# EAGLE board Rangkaian Supply (EAGLE 7.3.0)
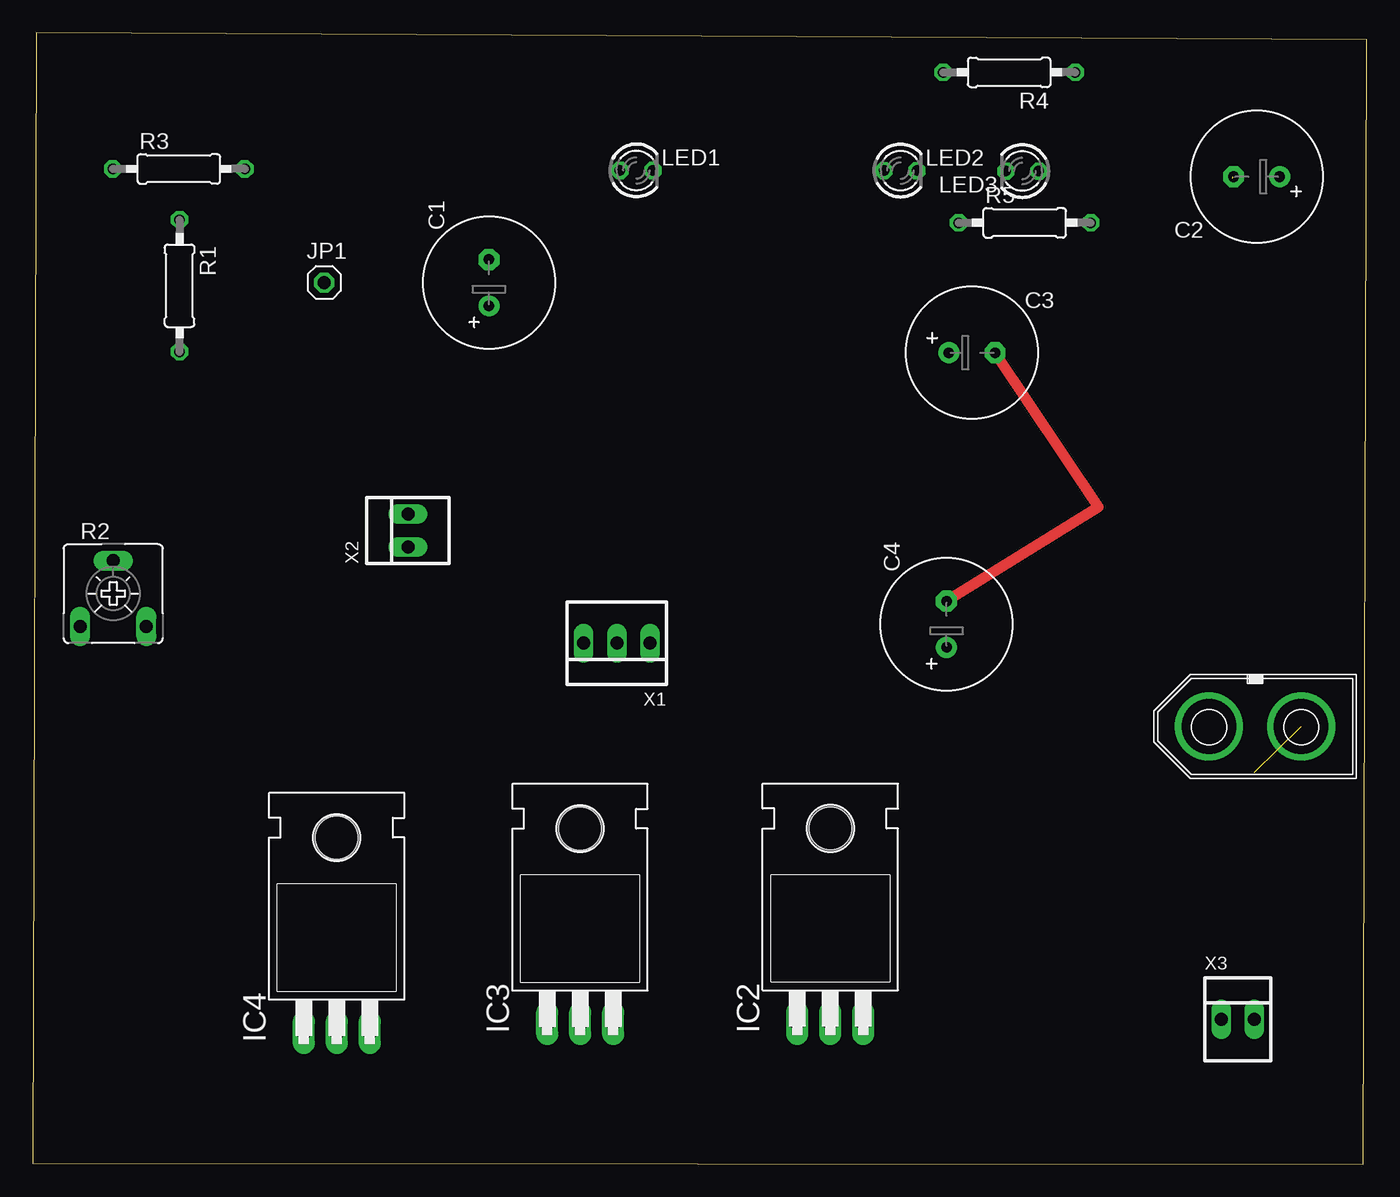
[diagram p0: board, top side]
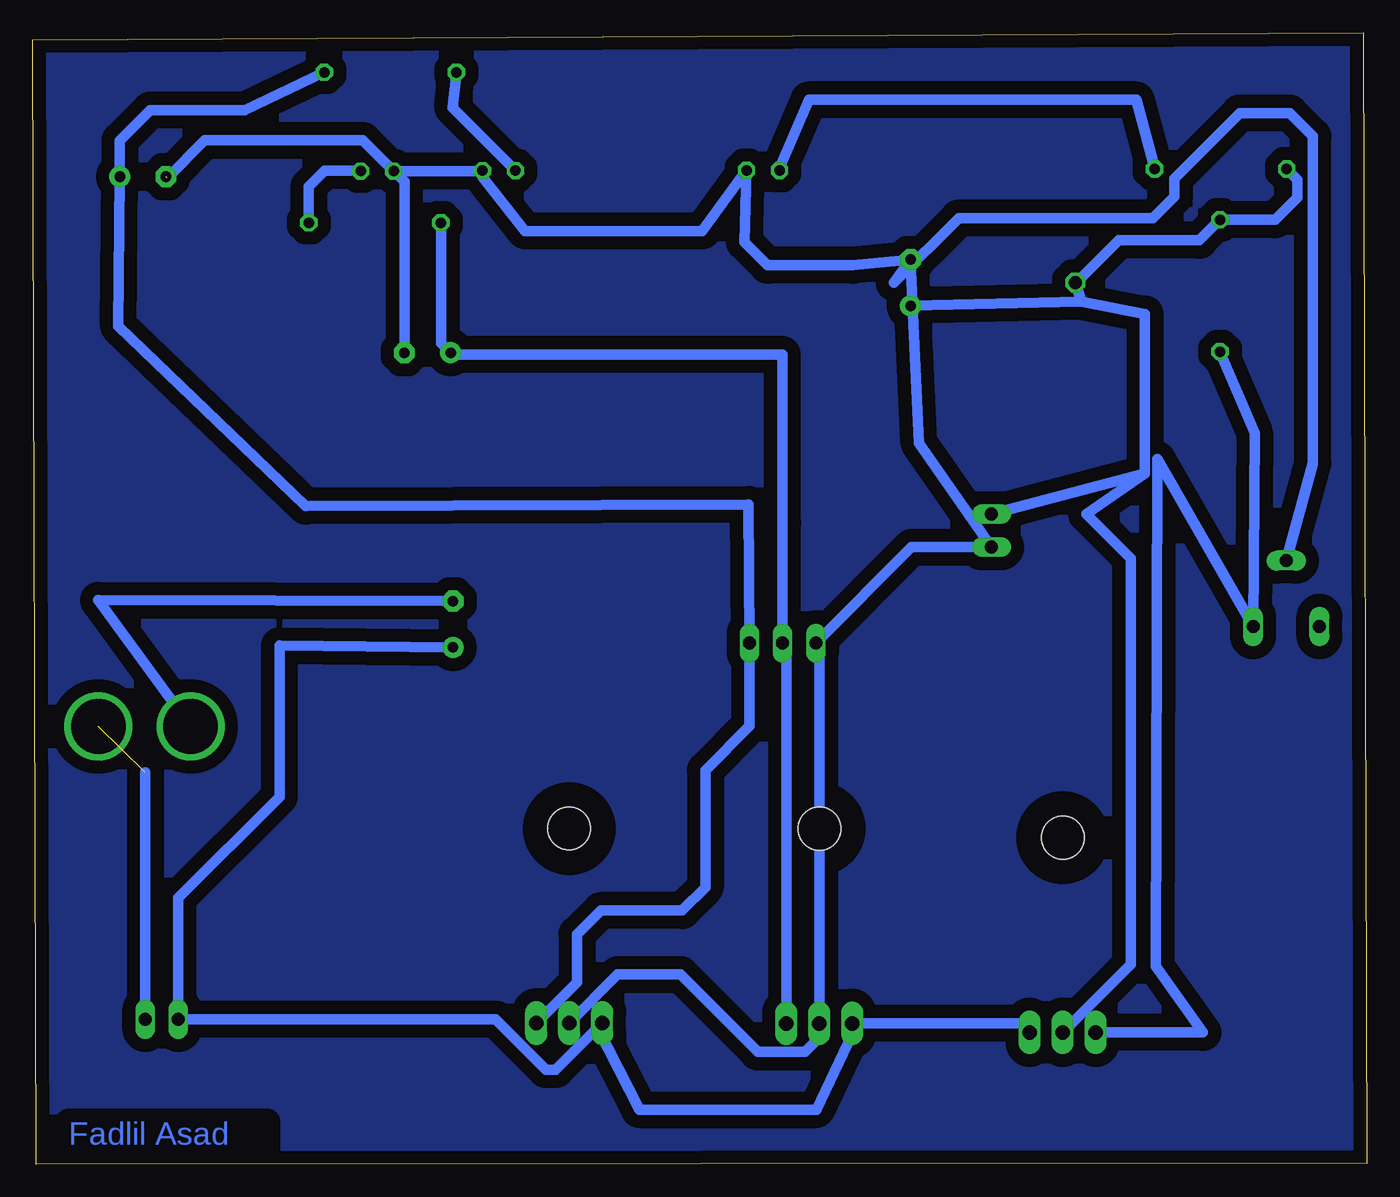
[diagram p1: board, bottom side, seen from below]

Size 102.67 x 87.09 mm. Coordinates in mm from the lower left corner, seen from the top.
Outline: 0,0.07 102.39,0 102.67,86.55 0.28,87.09 0,0.07
Copper layers (1*16): Top 0.035mm / dielectric 1.5mm / Bottom 0.035mm
Design rules "default": minimum track width 6mil, minimum drill 0.35mm, track to track 6mil, track to pad 6mil, pad to pad 6mil, via to via 6mil, smd to smd 6mil, copper to edge 40mil, drill to drill 6mil, minimum pad ring 10mil, minimum via ring 8mil, stop-mask expansion 4mil, vias tented up to drill 0mil, thermal gap 10mil

## Footprints (pad centres in the part's own frame; a part is rotated, then mirrored left to right if it is on the bottom)
E3,5-10 = drill 0.813 pad 1.6: + -1.778,0 | drill 0.813 pad 1.6 octagon: - 1.778,0
TO220H = drill 1.118 long: 1 -2.54,-10.16; 2 0,-10.16; 3 2.54,-10.16 | hole 3.302: 0,4.826
1X01 = drill 1.016 octagon: 1 0,0
LED3MM = drill 0.813 octagon: A -1.27,0; K 1.27,0
0207/10 = drill 0.813 octagon: 1 -5.08,0; 2 5.08,0
CA6V = drill 1.016 long: A -2.54,-2.54; E 2.54,-2.54; S 0,2.54
CON-XT60M = drill 4.2: V+ -3.55,0; V- 3.55,0
22-23-2031 = drill 1 long: 1 -2.54,0; 2 0,0; 3 2.54,0
22-23-2021 = drill 1 long: 1 -1.27,0; 2 1.27,0

## Placement (x,y rotation side)
C1  1000uF/16V  [E3,5-10]  35.12,67.83 90 top
C2  1000uF/16V  [E3,5-10]  94.18,75.99 180 top
C3  1000uF/16V  [E3,5-10]  72.28,62.45 0 top
C4  1000uF/16V  [E3,5-10]  70.32,41.56 90 top
IC2  7805T  [TO220H]  61.39,21.02 0 top
IC3  7805T  [TO220H]  42.13,21.01 0 top
IC4  317T  [TO220H]  23.41,20.32 0 top
JP1  [1X01]  22.45,67.85 0 top
LED1  [LED3MM]  46.46,76.48 0 top
LED2  [LED3MM]  66.78,76.47 0 top
LED3  [LED3MM]  76.15,76.43 180 top
R1  1K2  [0207/10]  11.31,67.6 270 top
R2  20K  [CA6V]  6.21,43.92 0 top
R3  1K  [0207/10]  11.26,76.59 0 top
R4  1K  [0207/10]  75.14,84.02 180 top
R5  1K  [0207/10]  76.33,72.44 0 top
VIN  [CON-XT60M]  94.06,33.69 180 top
X1  VSYS  [22-23-2031]  44.95,40.11 180 top
X2  VMOT  [22-23-2021]  28.89,48.75 90 top
X3  switch  [22-23-2021]  92.72,11.16 0 top

## Library data of the parts
C1-C4 R1 R3-R5 = rcl
IC2-IC4 = linear
JP1 = pinhead
LED1-LED3 = led
R2 = pot
VIN = con-XT60M
X1 = con-molex; MF: MOLEX; MPN: 22-23-2031; OC_FARNELL: 1462950; OC_NEWARK: 30C0862
X2 X3 = con-molex; MF: MOLEX; MPN: 22-23-2021; OC_FARNELL: 1462926; OC_NEWARK: 25C3832

## Nets
+12V: C3.+ IC3.3 R5.1 X1.2
GND: C1.- C2.- C3.- C4.- IC2.2 IC3.2 LED1.K LED2.K LED3.K R2.S VIN.V- X1.3 X2.1
N$1: IC4.1 R1.2 R2.E
N$2: LED1.A R3.2
N$3: LED3.A R5.2
N$4: VIN.V+ X3.2
N$5: LED2.A R4.2
VCC: C2.+ IC2.3 R4.1 X1.1
VDD: C1.+ IC4.2 JP1.1 R1.1 R3.1 X2.2
VPP: C4.+ IC2.1 IC3.1 IC4.3 X3.1

## Tracks (layer width: path | path; a pad name or v marks a point on that pad's centre or on a via)
+12V
  Bottom 0.813: R5.1 71.25,63.2 C3.+ 70.37,62.32 44.98,62.32 44.95,49.35 X1.2 44.67,39.82 IC3.3
GND  (1 unrouted)
  Top 0.813: C4.- 82.02,50.58 C3.-
  Bottom 0.813: 42.38,11.09 IC3.2 | C1.- 39.55,69.18 46.11,69.18 47.9,70.97 LED1.K 51.15,71.82 64.77,71.82 68.05,75.97 LED2.K 68.09,76.43 LED3.K | VIN.V- 97.61,43.41 C4.- | 92.3,75.9 89.41,78.79 77.26,78.79 LED3.K | R2.S 4.17,53.93 4.17,79.1 5.95,80.88 9.79,80.88 14.82,75.85 14.82,74.47 16.49,72.81 31.41,72.81 36.39,67.83 C1.- | C1.- 34.46,55.48 X2.1 35.04,47.48 X1.3 42.13,39.82 IC3.2 | C3.- 74.06,75.6 LED3.K | IC2.2 57.65,14.6 52.81,14.6 46.86,8.65 43.24,8.65 42.13,9.76 IC3.2
N$1
  Bottom 0.813: R1.2 8.65,56.26 R2.E 16.15,54.26 16.26,15.22 12.63,10.16 IC4.1
N$2
  Bottom 0.813: R3.2 17.76,81.91 42.94,81.91 45.19,76.65 LED1.A
N$3
  Bottom 0.813: LED3.A 77.46,76.47 80.18,76.47 81.41,75.23 R5.2
N$4  (1 unrouted)
  Bottom 0.813: 93.99,30.14 X3.2
N$5
  Bottom 0.813: LED2.A 70.35,81.3 R4.2
S$1
  pour Bottom (isolate 1.016): -0.2,-0.04 102.29,-0.04 102.29,1.18 102.59,3.76 102.45,86.83 0.18,86.97
VCC
  Bottom 0.813: 63.95,10.43 64.06,10.32 64.06,10.72 IC2.3 60.78,14.01 60.78,17.7 58.94,19.54 52.7,19.54 50.91,21.33 50.91,30.31 47.49,33.73 X1.1 47.58,50.78 81.65,50.65 96.07,64.5 C2.+ 95.96,78.77 93.61,81.12 86.36,81.12 R4.1
VDD
  Bottom 0.813: 11.17,72.55 R1.1 | R3.1 5.36,75.78 5.36,74.38 7.06,72.68 R1.1 | R1.1 12.89,71.11 19.11,71.11 22.37,67.85 JP1.1 21.97,66.37 | 21.97,66.37 C1.+ | IC4.2 18.18,15.39 18.18,46.62 21.58,50.02 17.09,53.14 | 17.09,53.14 X2.2 | 21.97,66.37 17.09,65.42 17.09,53.14
VPP
  Bottom 0.813: 59.21,10.5 IC2.1 | C4.+ 83.67,39.91 83.67,28.28 91.45,20.5 X3.1 67.04,11.16 63.16,7.28 62.43,7.28 59.21,10.5 | 59.21,10.5 55.97,4.2 42.37,4.2 39.59,10.04 IC3.1 26.64,10.85 IC4.3

## Text on the board
Bottom: Fadlil Asad